# Altium PCB Barun Gas Control Top Panel.PcbDoc
Units mm, origin at the board's own origin, x right, y up, seen from the top; angles counter-clockwise.
Board outline 170.27 x 120.29 mm, 2 copper layers (Top Layer, Bottom Layer); 6 components, 0 nets, 6 pads, 0 vias.
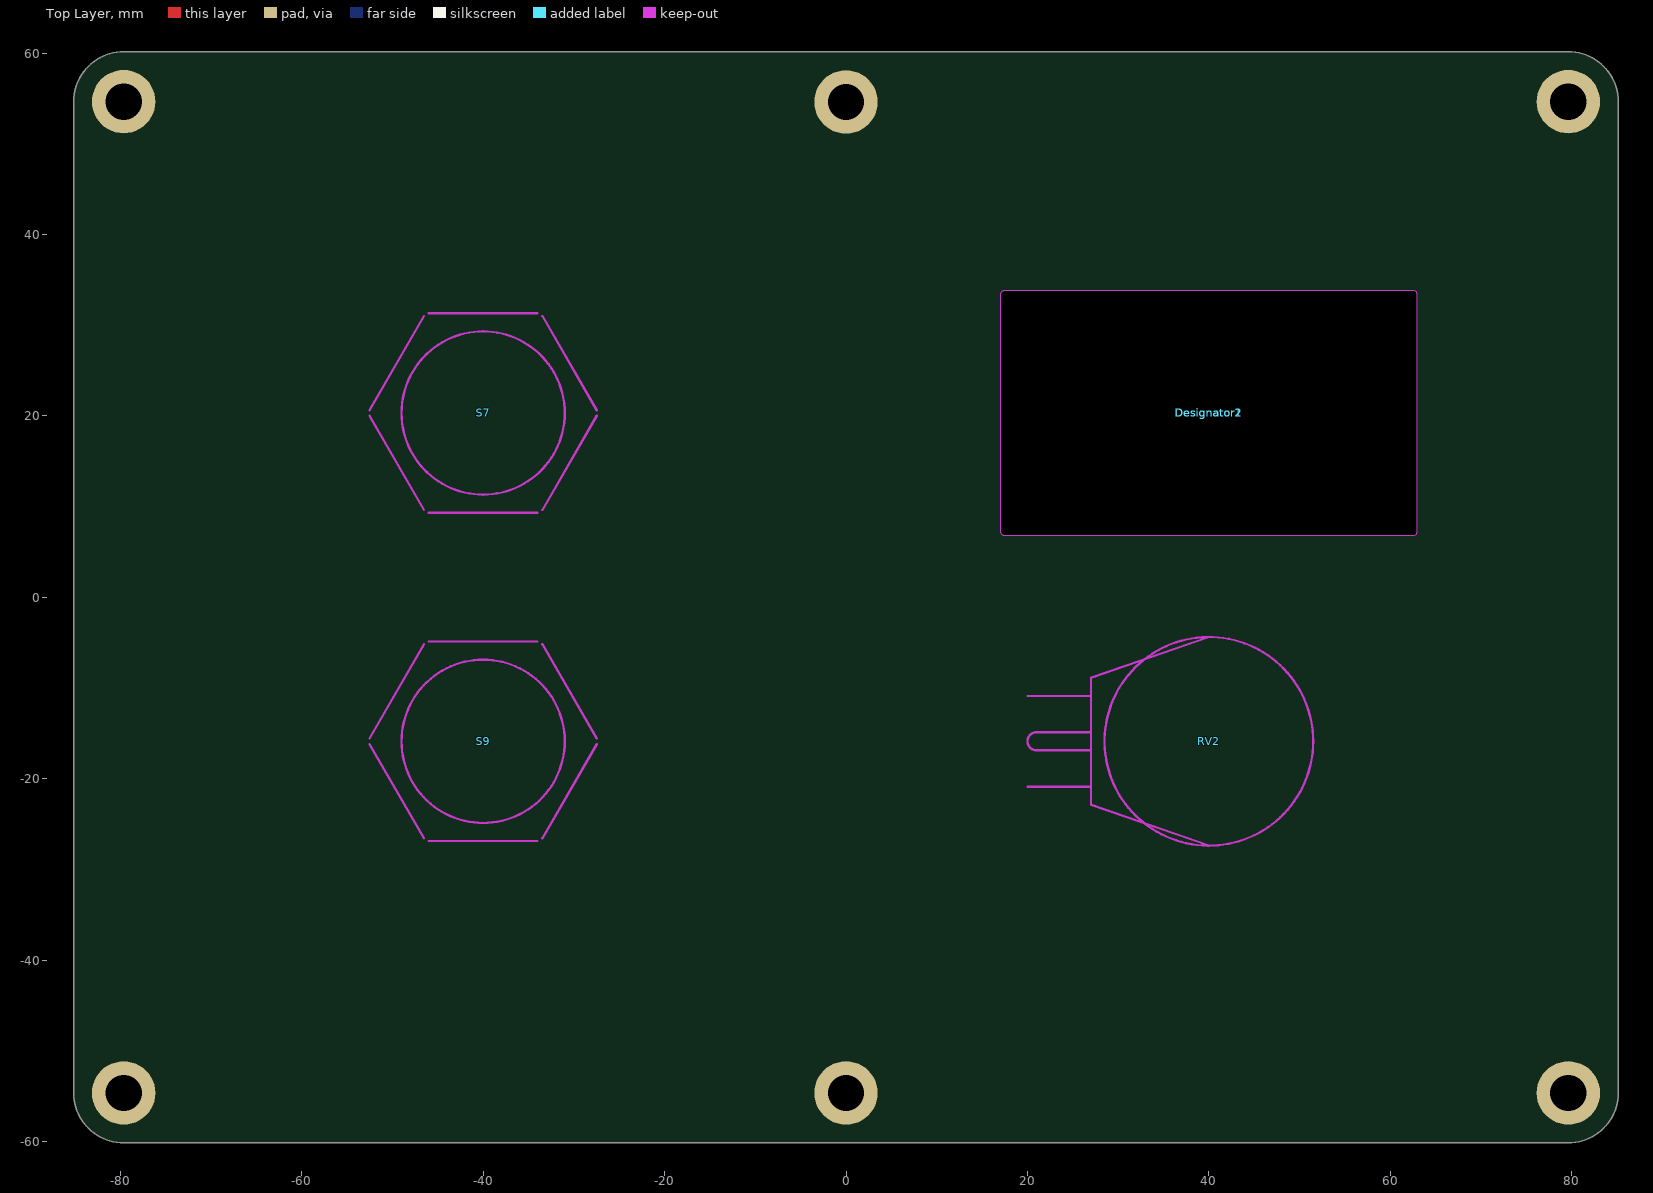
[diagram p0: Top Layer view]
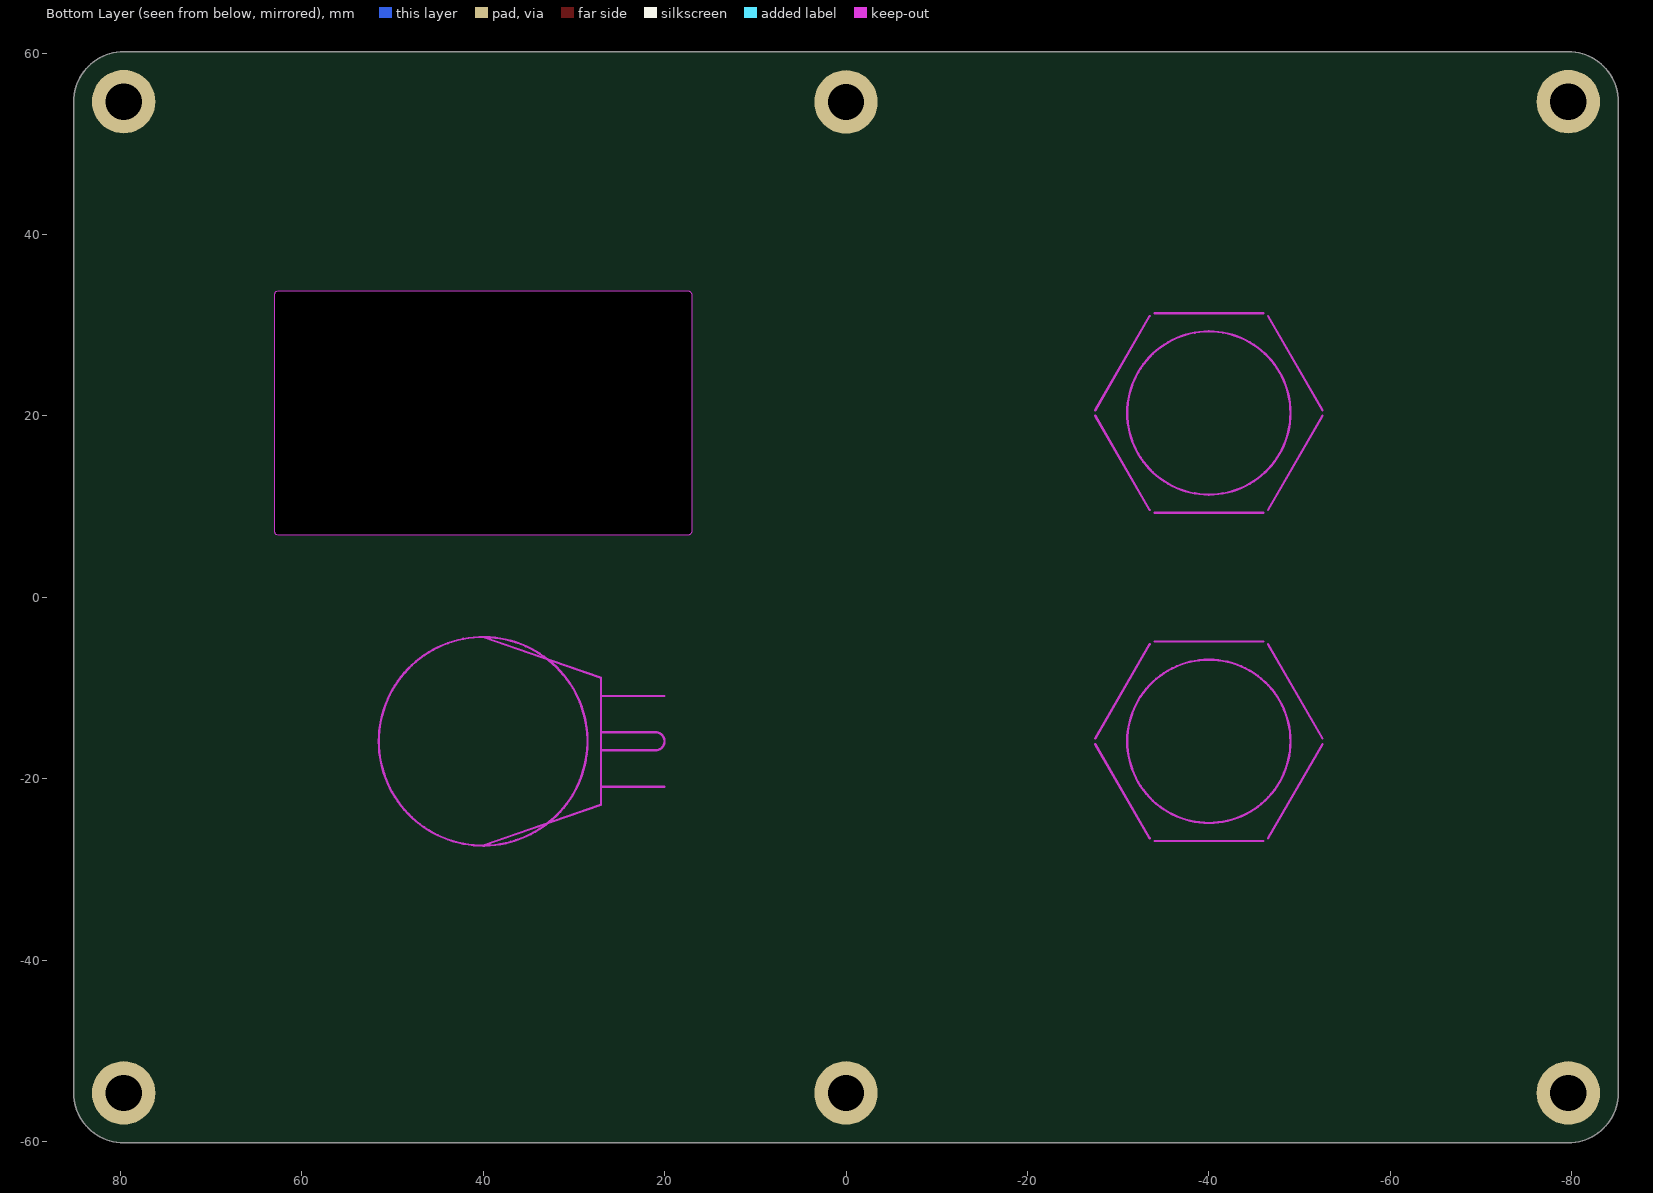
[diagram p1: Bottom Layer view, seen from below]

## Layer stack, top to bottom
Top Solder: solder mask 0.0102, Solder Resist, Dk 3.5
Top Layer: signal copper 0.0356
Dielectric 1: dielectric 0.32, FR-4, Dk 4.8
Bottom Layer: signal copper 0.0356
Bottom Solder: solder mask 0.0102, Solder Resist, Dk 3.5

## Board outline
-85.137,-54.644 -85.137,54.644 cw(c-79.637,54.644) -79.637,60.144 79.637,60.144 cw(c79.637,54.644) 85.137,54.644 85.137,-54.644 cw(c79.637,-54.644) 79.637,-60.144 -79.637,-60.144 cw(c-79.637,-54.644)
cut-out: 17.005,7.32 ccw(c17.505,7.32) 17.505,6.82 62.505,6.82 ccw(c62.505,7.32) 63.005,7.32 63.005,33.32 ccw(c62.505,33.32) 62.505,33.82 17.505,33.82 ccw(c17.505,33.32) 17.005,33.32

## Design rules (kind name [scope] priority, off if disabled: settings)
Clearance [All] p1: gap=0.254
PolygonConnect [All] p1: connectstyle=Relief reliefconductorwidth=0.254 reliefentries=4 polygonreliefangle="90 Angle" airgapwidth=0.254
RoutingVias [All] p1: holewidth=0.711 width=1.27 viastyle="Through Hole" minholewidth=0.711 minwidth=1.27 maxholewidth=0.711 maxwidth=1.27
SolderMaskExpansion [All] p1: expansion=0.102
Width [All] p1: maxlimit=0.254 minlimit=0.254 preferedwidth=0.254
30 further rules are at their usual default settings.

## Components (designator, comment, footprint, x,y, rotation, side; value= is the part's Value field where it differs from the comment)
Designator1 "Comment" "STD BEZEL" 40.005,20.32 r0 top
Designator2 "Comment" "STD BEZEL" 40.005,20.32 r0 top
Designator2 "Comment" "STD BEZEL" 40.005,20.32 r0 top
RV2 "Comment" POTENTIOMETER 40.005,-15.875 r270 top
S7 "Comment" "18MM BUTTON" -40.005,20.32 r0 top
S9 "Comment" "18MM BUTTON" -40.005,-15.875 r0 top

## Footprints (in the part's own frame and the unit in brackets; to place one, negate y for a bottom-side part, rotate by r counter-clockwise, add the part's x,y. Pads: shape width x height; smd on the part's side, far side on the other; paste and mask are expansions set on the pad)
"18MM BUTTON" [mm] "BUGLIN MP0045/1D2"
  Keep-Out Layer circle w0.254: c0,0 r9
  Keep-Out Layer lines w0.254: -12.526,-0.304 -6.526,-10.696 ; -12.526,0.304 -6.526,10.696 ; -6,-11 6,-11 ; -6,11 6,11 ; 6.526,-10.696 12.526,-0.304 ; 6.526,10.696 12.526,0.304
POTENTIOMETER [mm] "TYCO TW1103KA (Farnell 1502913)"
  Keep-Out Layer circle w0.254: c0,0 r11.5
  Keep-Out Layer lines w0.254: 5,-20 5,-13 0,-13 -5,-13 -5,-20 ; 1,-13 1,-19 cw(c0,-19) -1,-19 -1,-18 -1,-13 ; 11.5,0 7,-13 -7,-13 -11.5,0
"STD BEZEL" [mm]

## Free pads (board coordinates)
  round 7 hole 4: 0(-79.637,-54.644) 0(-79.637,54.644) 0(0,-54.644) 0(0,54.61) 0(79.637,-54.644) 0(79.637,54.644)

## Nets (pads, with @x,y where several pads share a name; then routed paths per layer and width w, separated by ;. In a path a pad name is that pad's centre, name@x,y a point inside that pad or via, vN(x,y) a via of type N, cw(c..) or ccw(c..) an arc to the next point about the centre after c; other vN are vias at no path point)

## Silkscreen, mask and mechanical layers (free items; w line width, h text height)
Mechanical 1:
  circle w0.254: c-79.637,54.644 r2
  circle w0.254: c79.637,-54.644 r2
  circle w0.254: c79.637,54.644 r2
  circle w0.254: c-79.637,-54.644 r2
  circle w0.254: c0,-54.644 r2
  circle w0.254: c0,54.61 r2
Mechanical 2:
  the board outline again, w0.254
Mechanical 3:
  lines w0.2: -79.637,-48.644 -79.637,0 -79.637,48.644 -79.375,48.644 ; -73.66,54.61 -39.37,54.61 ; -73.637,-54.61 -40.64,-54.61 -6,-54.61 ; -40.64,54.61 -6,54.61 ; 6,-54.61 40.64,-54.61 ; 6,54.61 40.64,54.61 73.637,54.61 ; 39.37,-54.61 73.66,-54.61 ; 79.637,-48.644 79.637,0 79.637,48.644
  lines w0.254: -79.637,-48.644 cw(c-79.637,-54.644) -73.637,-54.644 ; -79.637,48.644 ccw(c-79.637,54.644) -73.637,54.644 ; -6,-54.61 cw(c0,-54.61) 6,-54.61 ; -6,54.61 ccw(c0,54.61) 6,54.61 ; 73.637,-54.644 cw(c79.637,-54.644) 79.637,-48.644 ; 73.637,54.644 ccw(c79.637,54.644) 79.637,48.644
  text "CONTROL" at -58.42,34.29 h15
  text "%" at 66.04,15.24 h15
  text "PID" at -46.99,-1.27 h15
  text "MANUAL" at -58.42,-38.1 h15
  text "GAS RATE" at 20.32,-38.1 h15
Mechanical 4:
  drawing of 2461 lines, arcs and shapes, not listed

## Text inside footprints (layer, text, board x,y; h text height)
RV2: Mechanical 1 "CUT" at 41.005,-13.125 h2 r270; Mechanical 1 "OUT" at 37.005,-13.125 h2 r270
S7: Mechanical 1 "CUT OUT" at -46.505,19.32 h2
S9: Mechanical 1 "CUT OUT" at -46.505,-16.875 h2